# Altium PCB Glenn.PcbDoc
Units mil, origin at the board's own origin, x right, y up, seen from the top; angles counter-clockwise.
Board outline 6000 x 4000 mil, 2 copper layers (Top Layer, Bottom Layer); 25 components, 25 nets, 100 pads, 0 vias.
Unrouted connection lines stored in the file: 67.
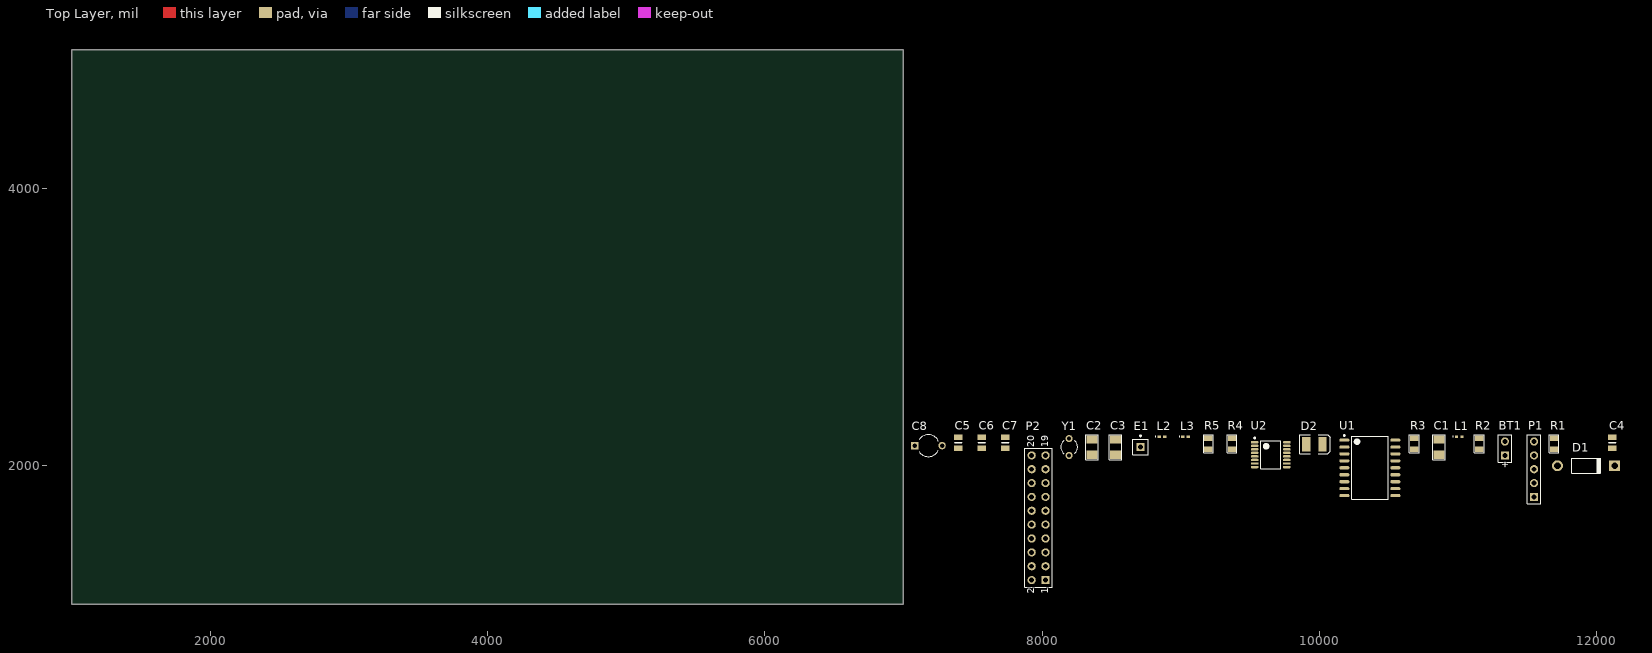
[diagram p0: Top Layer view]
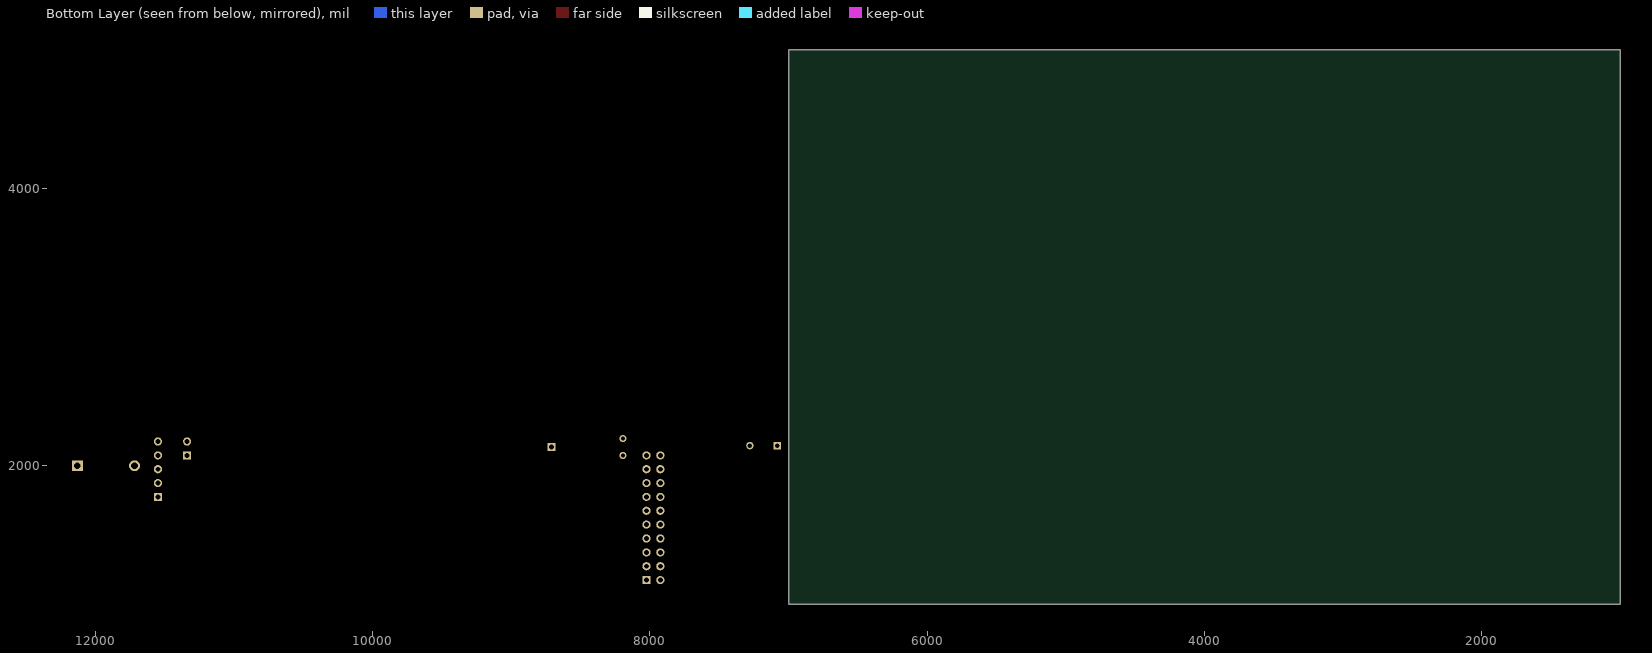
[diagram p1: Bottom Layer view, seen from below]

## Layer stack, top to bottom
Top Solder: solder mask 0.4, Solder Resist, Dk 3.5
Top Layer: signal copper 1.4
Dielectric 1: dielectric 12.6, FR-4, Dk 4.8
Bottom Layer: signal copper 1.4
Bottom Solder: solder mask 0.4, Solder Resist, Dk 3.5

## Board outline
1000,1000 7000,1000 7000,5000 1000,5000

## Design rules (kind name [scope] priority, off if disabled: settings)
Clearance [All] p1: gap=10
PolygonConnect [All] p1: connectstyle=Relief reliefconductorwidth=10 reliefentries=4 polygonreliefangle="90 Angle" airgapwidth=10
RoutingVias [All] p1: holewidth=28 width=50 viastyle="Through Hole" minholewidth=28 minwidth=50 maxholewidth=28 maxwidth=50
SolderMaskExpansion [All] p1: expansion=4
Width [All] p1: maxlimit=10 minlimit=10 preferedwidth=10
30 further rules are at their usual default settings.

## Components (designator, comment, footprint, x,y, rotation, side; value= is the part's Value field where it differs from the comment)
BT1 "Battery" BAT-2 11340,2125 r90 top
C1 "4.7pF" SMD-1206C 10865,2135 r0 top
C2 "4.7pF" SMD-1206C 8360,2135 r0 top
C3 "18pF" SMD-1206C 8530,2135 r0 top
C4 "0.1uF" SMD-0805C 12115,2165 r0 top
C5 "0.1uF" SMD-0805C 7395,2165 r0 top
C6 "0.1uF" SMD-0805C 7565,2165 r0 top
C7 "0.1uF" SMD-0805C 7735,2165 r0 top
C8 "Cap2" CAPR5-4X5 7180,2145 r0 top
D1 "Diode 1N4001" DO-41 11925,2000 r0 top
D2 "LED" 3.5X2.8X1.9 9965,2155 r0 top
E1 "Antenna" PIN1 8710,2135 r0 top
L1 "Inductor" 0402-A 11010,2210 r0 top
L2 "Inductor" 0402-A 8865,2210 r0 top
L3 "Inductor" 0402-A 9035,2210 r0 top
P1 "Header 5" HDR1X5 11550,1775 r90 top
P2 "Header 10X2" HDR2X10 8025,1175 r90 top
R1 "10k" SMD-0805-RES 11695,2160 r0 top
R2 "10k" SMD-0805-RES 11155,2160 r0 top
R3 "1k" SMD-0805-RES 10685,2160 r0 top
R4 "100" SMD-0805-RES 9370,2160 r0 top
R5 "1k" SMD-0805-RES 9200,2160 r0 top
U1 "PIC16F627A" PIC16F627A 10365,1985 r0 top
U2 "MRF49XA" MRF49XA 9650,2080 r0 top
Y1 "10MGz" R38 8195,2135 r0 top

## Footprints (in the part's own frame and the unit in brackets; to place one, negate y for a bottom-side part, rotate by r counter-clockwise, add the part's x,y. Pads: shape width x height; smd on the part's side, far side on the other; paste and mask are expansions set on the pad)
3.5X2.8X1.9 [mm] "SM LED; 2 C-Bend Leads; Body 3.5 x 2.8 x 1.9 mm, inc leads (LxWxH typ)"
  rect 1.5x2.6 smd: 1(-1.5,0) 2(1.5,0)
  silkscreen extent -2.65,-1.7 2.95,1.7
0402-A [mm] "Chip Inductor, Body 1.0x0.5mm, IPC High Density"
  rect 0.6x0.5 smd: 1(-0.5,0) 2(0.5,0)
  silkscreen extent -1.1,-0.15 -1.1,0.15, body extent -0.55,-0.3 0.55,0.3, height 0.55
BAT-2 [mm] "Battery; 2 Leads"
  rect 1.5x1.5 hole 0.9: 1(-1.27,0)
  round 1.5 hole 0.9: 2(1.27,0)
  silkscreen extent -2.54,-1.27 2.54,1.27
CAPR5-4X5 [mm] "Capacitor; 2 Leads"
  rect 1.35x1.35 hole 0.8: 1(-2.5,0)
  round 1.35 hole 0.8: 2(2.5,0)
  silkscreen extent -1.69,-2 1.82,2
DO-41 [mm] "Diode, Axial; Body 5.2 x 2.7 mm (LxDia. max), Lead Dia. 0.86 mm (max)"
  round 2 hole 1.2: 1(-5.23,0)
  rect 2x2 hole 1.2: 2(5.23,0)
  silkscreen extent -2.65,-1.4 2.75,1.4
HDR1X5 [mm] "Connector; Header; 5 Position"
  rect 1.5x1.5 hole 0.9: 1(0,0)
  round 1.5 hole 0.9: 2(2.54,0) 3(5.08,0) 4(7.62,0) 5(10.16,0)
  silkscreen extent -1.27,-1.27 11.43,1.27
HDR2X10 [mm] "Connector; Header; 10x2 Position"
  rect 1.5x1.5 hole 0.9: 1(0,0)
  round 1.5 hole 0.9: 2(0,2.54) 3(2.54,0) 4(2.54,2.54) 5(5.08,0) 6(5.08,2.54) 7(7.62,0) 8(7.62,2.54) 9(10.16,0) 10(10.16,2.54) 11(12.7,0) 12(12.7,2.54) 13(15.24,0) 14(15.24,2.54) 15(17.78,0) 16(17.78,2.54) 17(20.32,0) 18(20.32,2.54) 19(22.86,0) 20(22.86,2.54)
  silkscreen extent -1.27,-1.27 24.13,3.81
MRF49XA [mm]
  oval 1.4x0.45 smd: 1(-2.95,2.275) 2(-2.95,1.625) 3(-2.95,0.975) 4(-2.95,0.325) 5(-2.95,-0.325) 6(-2.95,-0.975) 7(-2.95,-1.625) 8(-2.95,-2.275) 9(2.95,-2.275) 10(2.95,-1.625) 11(2.95,-0.975) 12(2.95,-0.325) 13(2.95,0.325) 14(2.95,0.975) 15(2.95,1.625) 16(2.95,2.275)
  silkscreen extent -3.07,-2.55 1.85,3.17, body extent -2.25,-2.55 2.25,2.55, height 1.2
PIC16F627A [mm]
  oval 1.85x0.6 smd: 1(-4.675,5.08) 2(-4.675,3.81) 3(-4.675,2.54) 4(-4.675,1.27) 5(-4.675,0) 6(-4.675,-1.27) 7(-4.675,-2.54) 8(-4.675,-3.81) 9(-4.675,-5.08) 10(4.675,-5.08) 11(4.675,-3.81) 12(4.675,-2.54) 13(4.675,-1.27) 14(4.675,0) 15(4.675,1.27) 16(4.675,2.54) 17(4.675,3.81) 18(4.675,5.08)
  silkscreen extent -4.8,-5.8 3.35,6.05, body extent -3.75,-5.8 3.75,5.8, height 2.05
PIN1 [mm] "Generic Antenna; 1 Lead"
  rect 1.5x1.5 hole 0.9: 1(0,0)
  silkscreen extent -1.4,-1.4 1.4,2.17
R38 [mm] "Crystal, Thru-Hole; 2 Leads; Body 3.1 x 8.2 mm (Dia.xH)"
  round 1.3 hole 0.7: 1(0,1.55) 2(0,-1.55)
  silkscreen extent -1.55,-1.19 1.55,1.17
SMD-0805-RES [mil]
  rect 60x40 smd: 1(0,40) 2(0,-40)
  silkscreen extent -35,-65 35,65, body extent -24,-39 26,39, height 31
SMD-0805C [mil]
  rect 60x40 smd: 1(0,40) 2(0,-40)
  silkscreen extent -25,0 25,0, body extent -25,-39 25,39, height 35
SMD-1206C [mil]
  rect 80x60 smd: 1(0,55) 2(0,-55)
  silkscreen extent -45,-90 45,90, body extent -31,-63 32,63, height 39

## Part data
BT1: "Multicell Battery"
C1 C2 C3: library part GC331AD72E333KX01D, "CAP CER 0.033UF 250V X7T 1206"
C4 C5 C6 C7: library part GC321AD72E103KX01D, "CAP CER 10000PF 250V X7T 0805"
C8: "Capacitor"
D1: "1 Amp General Purpose Rectifier"
D2: library part LED3, "Typical BLUE SiC LED"
E1: "Generic Antenna"
P1: "Header, 5-Pin"
P2: "Header, 10-Pin, Dual row"
R1 R2 R3 R4 R5: library part ERJ-6BQF1R0V, "RES SMD 1 OHM 1% 1/3W 0805"
Y1: library part XTAL, "Crystal Oscillator"

## Nets (pads, with @x,y where several pads share a name; then routed paths per layer and width w, separated by ;. In a path a pad name is that pad's centre, name@x,y a point inside that pad or via, vN(x,y) a via of type N, cw(c..) or ccw(c..) an arc to the next point about the centre after c; other vN are vias at no path point)
CS: U1.17 U2.3
FSK: U1.18 U2.6
GND: BT1.2 C4.1 C5.2 C6.2 C7.2 C8.2 D2.2 P1.3 P2.2 P2.4 P2.6 P2.8 P2.10 P2.12 P2.14 P2.16 P2.18 P2.20 U1.5 U2.11 Y1.2
MCRL: D1.2 P1.1 P2.1 R3.1 U1.4
NetC1_2: C1.2 L1.1 L2.2 L3.2 U2.13
NetC2_1: C2.1 L2.1 U2.12
NetC2_2: C2.2 C3.1 L3.1
NetC3_2: C3.2 E1.1
NetC4_2: C4.2 D1.1 R1.1
NetD2_1: D2.1 R4.2
NetP1_2: P1.2 R2.2
NetR4_1: R4.1 U1.16
NetR5_1: R5.1 U1.15
NetU2_9: U2.9 Y1.1
RB0: P2.3 U1.6
RB1: P2.5 U1.7
RB2: P2.7 U1.8
RB3: P2.9 U1.9
RB4: P2.11 U1.10
RB5: P2.13 U1.11
RB6: P1.5 P2.15 U1.12
RB7: P1.4 P2.17 U1.13
SCK: U1.2 U2.2
SDI: U1.1 U2.1
VCC: BT1.1 C1.1 C5.1 C6.1 C7.1 C8.1 L1.2 P2.19 R1.2 R2.1 R3.2 R5.2 U1.14 U2.14
pads on no net: U1.3 U2.4 U2.5 U2.7 U2.8 U2.10 U2.15 U2.16

## Text inside footprints (layer, text, board x,y; h text height)
BT1: Top Overlay "+" at 11362.72,1980.51 h45.28 r90
P2: Top Overlay "2" at 7945,1075 h50 r90; Top Overlay "1" at 8045,1075 h50 r90; Top Overlay "19" at 8045,2135 h50 r90; Top Overlay "20" at 7945,2135 h50 r90